# EAGLE board mdac-attenuator (EAGLE 7.7.0)
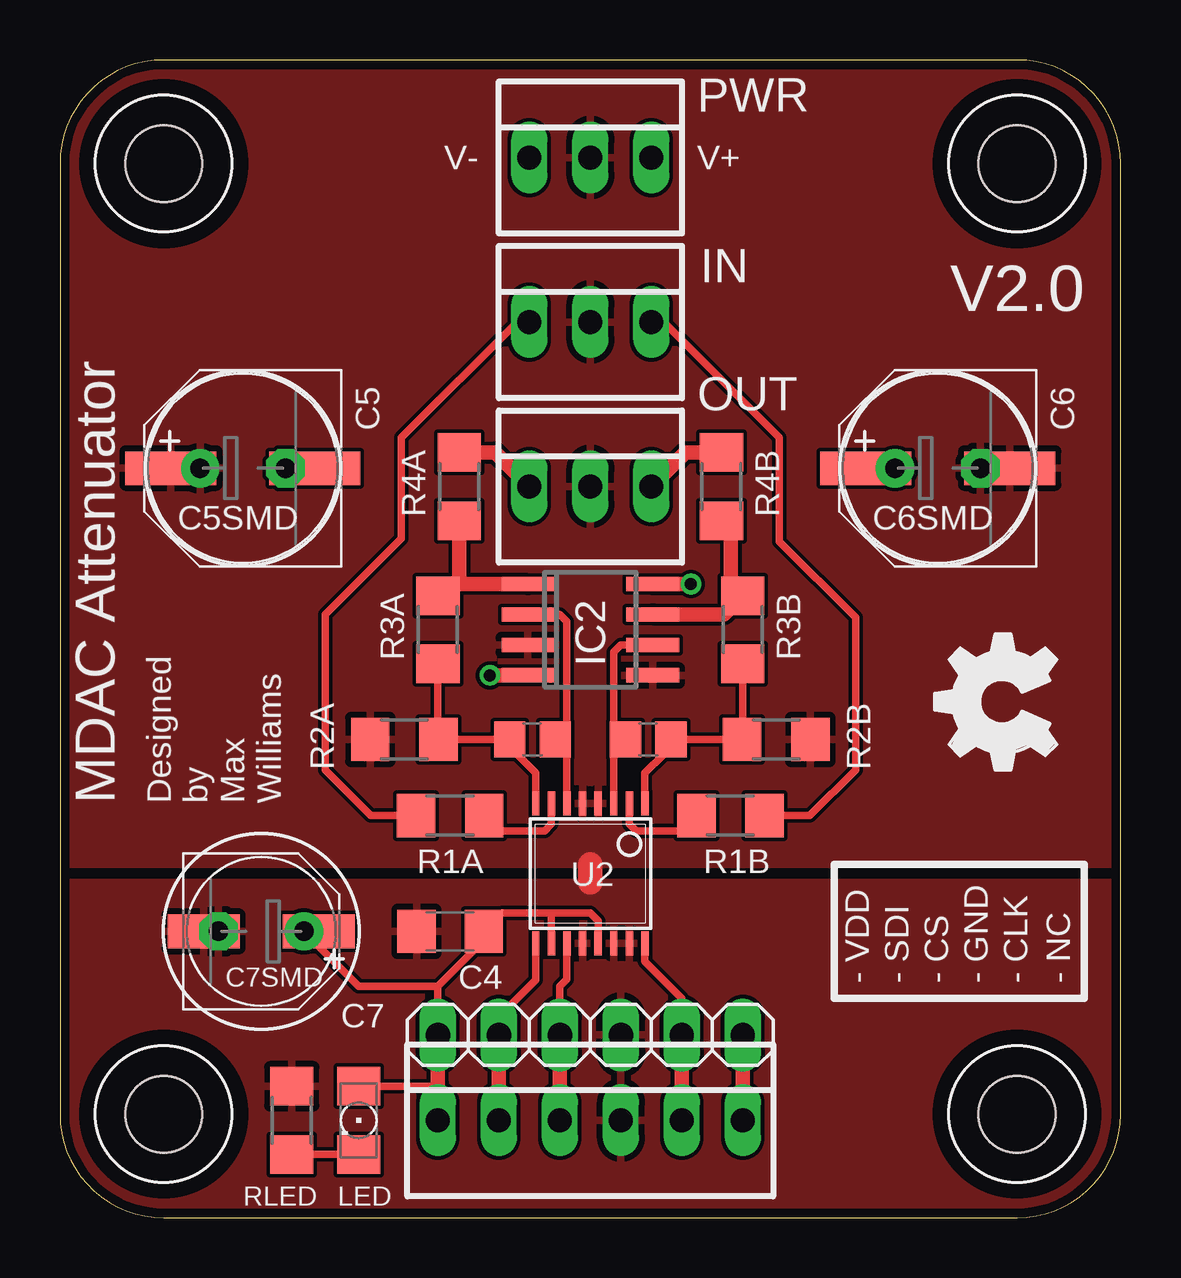
[diagram p0: board, top side]
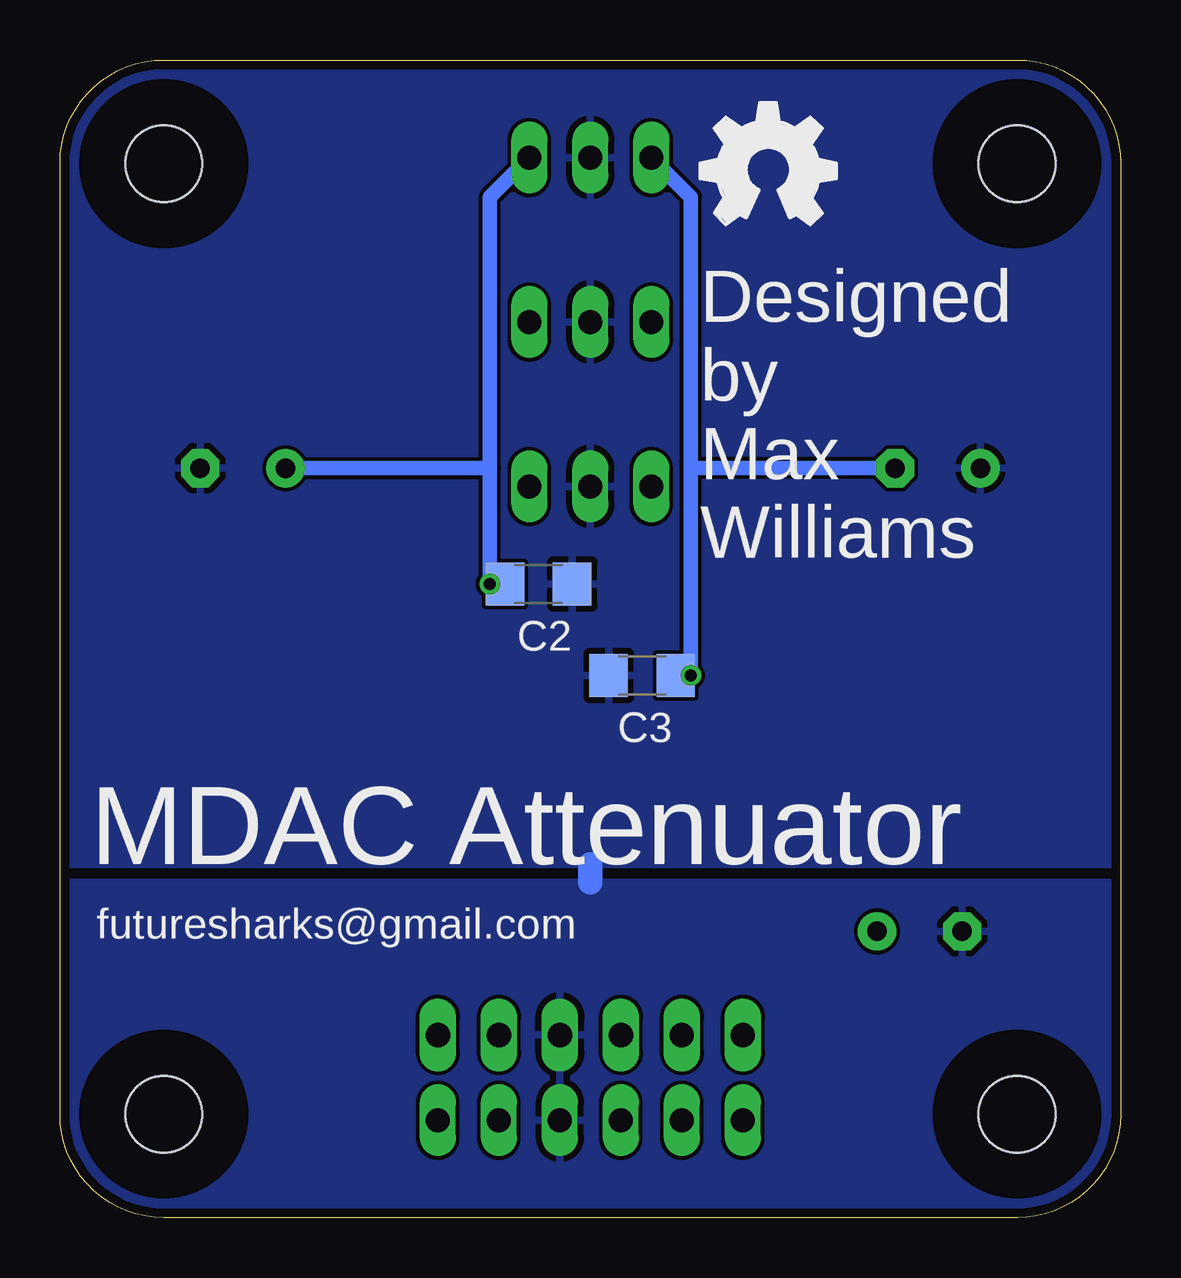
[diagram p1: board, bottom side, seen from below]

Size 44.2 x 48.26 mm. Coordinates in mm from the lower left corner, seen from the top.
Outline: 39.88,0 arc90 44.2,4.32 44.2,43.94 arc90 39.88,48.26 4.32,48.26 arc90 0,43.94 0,4.32 arc90 4.32,0 39.88,0
Copper layers (1*16): Top 0.0356mm / dielectric 1.5011mm / Bottom 0.0356mm
Design rules "LaenPCBOrder": minimum track width 6mil, minimum drill 13mil, track to track 6mil, track to pad 6mil, pad to pad 6mil, via to via 6mil, smd to smd 6mil, copper to edge 15mil, drill to drill 6mil, minimum pad ring 7mil, minimum via ring 7mil, stop-mask expansion 4mil, vias tented up to drill 0mil, thermal gap 10mil

## Footprints (pad centres in the part's own frame; a part is rotated, then mirrored left to right if it is on the bottom)
C0805 = smd 1.3 x 1.5: 1 -0.95,0; 2 0.95,0
C1206 = smd 1.6 x 1.8: 1 -1.4,0; 2 1.4,0
E3,5-8 = drill 0.813 pad 1.6: + -1.778,0 | drill 0.813 pad 1.6 octagon: - 1.778,0
PANASONIC_E = smd 3.8 x 1.4: + 3,0; - -3,0
PANASONIC_D = smd 3 x 1.4: + 2.4,0; - -2.4,0
SO8 = smd 0.6 x 2.2: 1 -1.905,-2.6; 2 -0.635,-2.6; 3 0.635,-2.6; 4 1.905,-2.6; 5 1.905,2.6; 6 0.635,2.6; 7 -0.635,2.6; 8 -1.905,2.6
22-23-2031 = drill 1 long: 1 -2.54,0; 2 0,0; 3 2.54,0
1X06 = drill 1.016 long: 1 -6.35,0; 2 -3.81,0; 3 -1.27,0; 4 1.27,0; 5 3.81,0; 6 6.35,0
1206 = smd 1.6 x 1.803: A -1.422,0; C 1.422,0
R1206 = smd 1.6 x 1.803: 1 -1.422,0; 2 1.422,0
TSSOP16 = smd 0.305 x 0.991: 1 -2.275,-2.918; 2 -1.625,-2.918; 3 -0.975,-2.918; 4 -0.325,-2.918; 5 0.325,-2.918; 6 0.975,-2.918; 7 1.625,-2.918; 8 2.275,-2.918; 9 2.275,2.918; 10 1.625,2.918; 11 0.975,2.918; 12 0.325,2.918; 13 -0.325,2.918; 14 -0.975,2.918; 15 -1.625,2.918; 16 -2.275,2.918
M3_HOLE = hole 3.2: 0,0
22-23-2061 = drill 1 long: 1 -6.35,0; 2 -3.81,0; 3 -1.27,0; 4 1.27,0; 5 3.81,0; 6 6.35,0

## Placement (x,y rotation side)
C1A  [C0805]  19.68,19.94 180 top
C1B  [C0805]  24.51,19.94 180 top
C2  [C1206]  24.26,26.42 0 bottom
C3  [C1206]  19.94,22.61 0 bottom
C4  [C1206]  16.26,11.94 180 top
C5  [E3,5-8]  7.62,31.24 0 top
C5SMD  [PANASONIC_E]  7.62,31.24 180 top
C6  [E3,5-8]  36.58,31.24 0 top
C6SMD  [PANASONIC_E]  36.58,31.24 180 top
C7  [E3,5-8]  8.38,11.94 180 top
C7SMD  [PANASONIC_D]  8.38,11.94 0 top
IC2  AD8599R  [SO8]  22.1,24.51 270 top
IN  [22-23-2031]  22.1,37.34 0 top
JP1  [1X06]  22.1,7.62 0 top
LED  [1206]  12.45,4.06 270 top
LOGO1  OSHW_LOGO_FILLX0200-NT  [OSHW_FILLX200_NOTEXT]  41.53,18.67 90 top
LOGO2  OSHW_LOGO_FILLX0200-NT  [OSHW_FILLX200_NOTEXT]  17.53,41.4 0 bottom
OUT  [22-23-2031]  22.1,30.48 0 top
PWR  [22-23-2031]  22.1,44.2 0 top
R1A  [R1206]  16.26,16.76 0 top
R1B  [R1206]  27.94,16.76 0 top
R2A  [R1206]  14.35,19.94 0 top
R2B  [R1206]  29.84,19.94 0 top
R3A  [R1206]  15.75,24.51 270 top
R3B  [R1206]  28.45,24.51 270 top
R4A  100R  [R1206]  16.64,30.48 90 top
R4B  100R  [R1206]  27.56,30.48 90 top
RLED  [R1206]  9.65,4.06 90 top
U2  DAC8812  [TSSOP16]  22.1,14.35 180 top
U$1  M3_HOLE  [M3_HOLE]  4.32,4.32 0 top
U$2  M3_HOLE  [M3_HOLE]  39.88,4.32 0 top
U$3  M3_HOLE  [M3_HOLE]  39.88,43.94 0 top
U$4  M3_HOLE  [M3_HOLE]  4.32,43.94 0 top
X1  [22-23-2061]  22.1,4.06 0 top

## Library data of the parts
C1A C1B C2-C5 C5SMD C6 C6SMD C7 C7SMD R1A R1B R2A R2B R3A R3B R4A R4B RLED = rcl
IC2 = analog-devices-3
IN OUT PWR = con-molex; MF: MOLEX; MPN: 22-23-2031; OC_FARNELL: 1462950; OC_NEWARK: 30C0862
JP1 = pinhead
LED = led
LOGO1 LOGO2 = ohw-logo
U2 = DAC8812
U$1-U$4 = mouting-holes
X1 = con-molex; MF: MOLEX; MPN: 22-23-2061; OC_FARNELL: 1462922; OC_NEWARK: 27C1933

## Nets
+5V: C4.1 C7.+ C7SMD.+ JP1.1 LED.A U2.10 U2.13 X1.1
+15V: C2.1 C6.+ C6SMD.+ IC2.8 PWR.3
-15V: C3.2 C5.- C5SMD.- IC2.4 PWR.1
AGND: C2.2 C3.1 C4.2 C5.+ C5SMD.+ C6.- C6SMD.- C7.- C7SMD.- IC2.3 IC2.5 IN.2 JP1.4 OUT.2 PWR.2 R2A.1 R2B.2 RLED.2 U2.4 U2.5 U2.12 U2.14 U2.15 X1.4
CLK: JP1.5 U2.16 X1.5
CS: JP1.3 U2.11 X1.3
INL: IN.1 R1A.1
INR: IN.3 R1B.2
N$1: C1A.1 IC2.2 U2.6
N$2: C1B.2 IC2.6 U2.3
N$3: R1B.1 U2.2
N$4: IC2.7 R3B.1 R4B.1
N$5: JP1.6 X1.6
N$7: LED.C RLED.1
N$8: IC2.1 R3A.1 R4A.1
N$9: R1A.2 U2.7
N$12: C1A.2 R2A.2 R3A.2 U2.8
N$19: C1B.1 R2B.1 R3B.2 U2.1
OUTL: OUT.1 R4A.2
OUTR: OUT.3 R4B.2
SDI: JP1.2 U2.9 X1.2

## Tracks (layer width: path | path; a pad name or v marks a point on that pad's centre or on a via)
+5V
  Top 0.305: U2.13 22.42,12.38 22.1,12.7 20.57,12.7 | 20.57,12.7 18.42,12.7 C4.1 17.66,11.56 15.75,9.65 | U2.10 20.47,12.6 20.57,12.7 | 15.75,5.59 15.65,5.49 LED.A | 15.75,9.65 JP1.1 | 15.75,9.65 12.45,9.65 C7.+ C7SMD.+
  Top 0.61: X1.1 15.75,5.59 JP1.1
+15V  (via drill 0.5)
  Top 0.406: C6SMD.+ C6.+
  Top 0.61: IC2.8 v26.29,26.42
  Bottom 0.61: C2.1 v26.29,26.42 26.29,31.24 | 26.29,31.24 26.29,42.55 PWR.3 | C6.+ 26.29,31.24
-15V  (via drill 0.5)
  Top 0.406: C5SMD.- C5.-
  Top 0.61: IC2.4 v17.91,22.61
  Bottom 0.61: C3.2 v17.91,22.61 17.91,31.24 | 17.91,31.24 17.91,42.55 PWR.1 | C5.- 17.91,31.24
AGND
  Top 1.016: 22.1,13.97 22.1,14.73
  Bottom 1.016: 22.1,14.73 22.1,13.97
  pour Bottom: 0.25,14.73 0.25,48.01 43.94,48.01 43.94,14.73
  pour Top: 0.25,14.73 0.25,48.01 43.94,48.01 43.94,14.73
  pour Top: 0.25,13.97 0.25,0.25 43.94,0.25 43.94,13.97
  pour Bottom: 0.25,13.97 0.25,0.25 43.94,0.25 43.94,13.97
CLK
  Top 0.305: U2.16 24.37,10.68 25.91,9.14 JP1.5
  Top 0.61: X1.5 JP1.5
CS
  Top 0.305: U2.11 21.12,9.95 20.83,9.65 JP1.3
  Top 0.61: X1.3 JP1.3
INL
  Top 0.305: R1A.1 12.95,16.76 11.05,18.67 11.05,25.15 14.22,28.32 14.22,32.51 19.05,37.34 IN.1
INR
  Top 0.305: R1B.2 31.24,16.76 33.15,18.67 33.15,25.02 29.97,28.19 29.97,32.51 25.15,37.34 IN.3
N$1
  Top 0.305: U2.6 21.12,19.94 | 21.12,19.94 21.12,24.85 20.83,25.15 IC2.2 | C1A.1 21.12,19.94
N$2
  Top 0.305: U2.3 23.07,20.32 | 23.07,20.32 23.07,23.58 23.37,23.88 IC2.6 | C1B.2 23.07,20.32
N$3
  Top 0.305: U2.2 23.72,16.41 24,16.13 26.01,16.13 R1B.1
N$4
  Top 0.61: IC2.7 27.66,25.15 R3B.1 27.96,25.93 27.94,25.91 27.94,28.68 R4B.1
N$5
  Top 0.61: X1.6 JP1.6
N$7
  Top 0.305: RLED.1 LED.C
N$8
  Top 0.61: IC2.1 16.64,26.42 | 16.64,26.42 16.23,26.42 R3A.1 | R4A.1 16.64,26.42
N$9
  Top 0.305: U2.7 20.47,16.41 20.19,16.13 18.19,16.13 R1A.2
N$12
  Top 0.305: U2.8 19.82,18.53 19.05,19.3 19.05,19.62 C1A.2 R2A.2 15.75,19.96 R3A.2
N$19
  Top 0.305: U2.1 24.37,18.53 25.15,19.3 25.15,19.62 C1B.1 R2B.1 28.45,19.96 R3B.2
OUTL
  Top 0.61: R4A.2 18.14,31.9 OUT.1
OUTR
  Top 0.61: R4B.2 26.06,31.9 OUT.3
SDI
  Top 0.305: U2.9 19.82,9.92 18.29,8.38 JP1.2
  Top 0.61: X1.2 JP1.2

## Text on the board
tNames: V- | V+ | V2.0 | MDAC Attenuator | Designed / by / Max / Williams | - VDD | - SDI | - CS | - GND | - CLK | - NC
bNames: Designed / by / Max / Williams | MDAC Attenuator | futuresharks@gmail.com